# EAGLE board box (EAGLE 6.5.0)
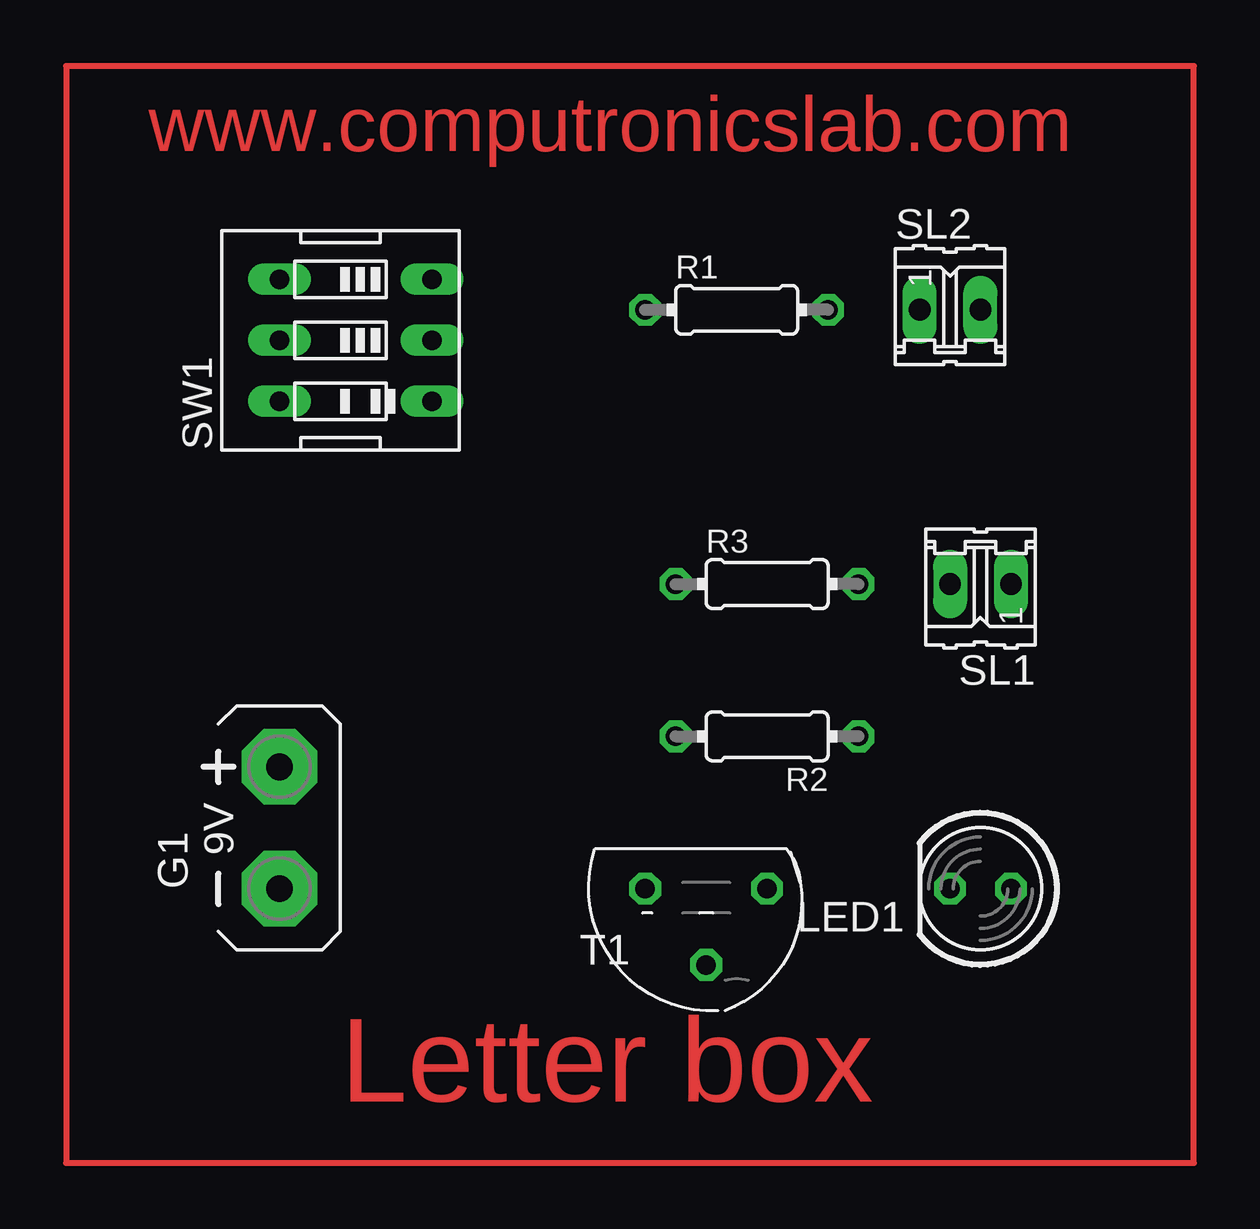
[diagram p0: board, top side]
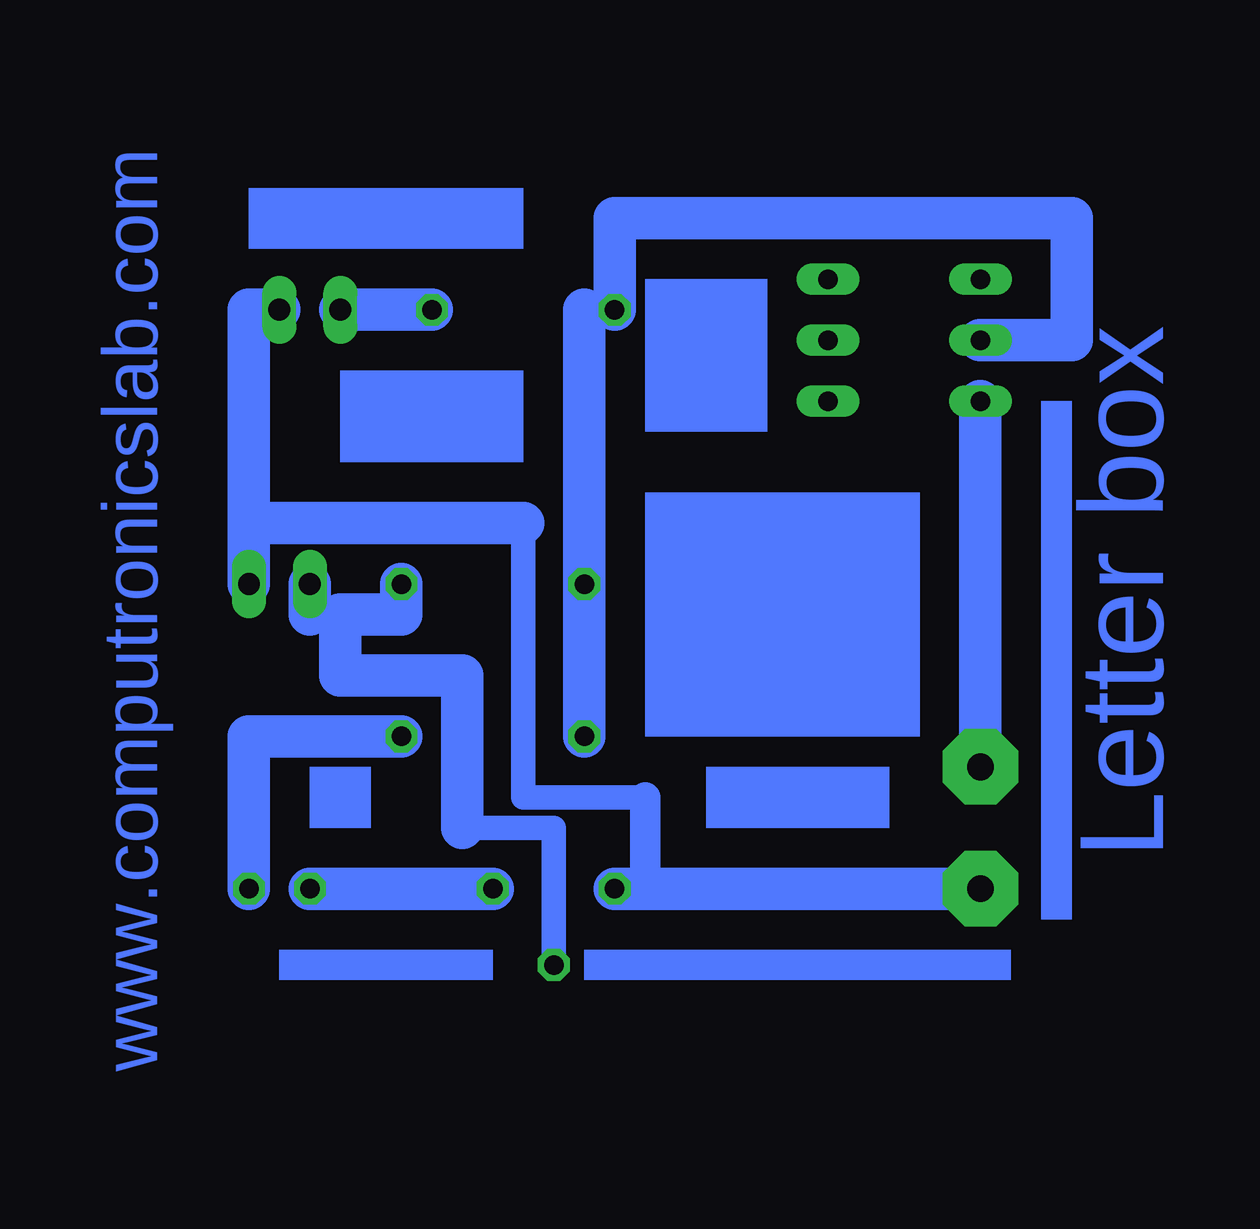
[diagram p1: board, bottom side, seen from below]

No outline drawn. Coordinates in mm, seen from the top.
Copper layers (1*16): Top 0.035mm / dielectric 1.5mm / Bottom 0.035mm
Design rules "default": minimum track width 10mil, minimum drill 24mil, track to track 8mil, track to pad 8mil, pad to pad 8mil, via to via 8mil, smd to smd 8mil, copper to edge 40mil, drill to drill 8mil, minimum pad ring 10mil, minimum via ring 8mil, stop-mask expansion 4mil, vias tented up to drill 0mil, thermal gap 10mil

## Footprints (pad centres in the part's own frame; a part is rotated, then mirrored left to right if it is on the bottom)
AB9V = drill 1.118 pad 3.15 octagon: + 0,2.54; - 0,-2.54
LED5MM = drill 0.813 octagon: A -1.27,0; K 1.27,0
0204/7 = drill 0.813 octagon: 1 -3.81,0; 2 3.81,0
02P = drill 0.914 long: 1 -1.27,0; 2 1.27,0
EDG-03 = drill 0.813 long: 1 -2.54,-3.81; 2 0,-3.81; 3 2.54,-3.81; 4 2.54,2.54; 5 0,2.54; 6 -2.54,2.54
TO92 = drill 0.813 octagon: 1 2.54,-1.27; 2 0,1.905; 3 -2.54,-1.27

## Placement (x,y rotation side)
G1  AB9V  [AB9V]  10.16,36.83 0 top
LED1  5mm  [LED5MM]  39.37,34.29 180 top
R1  330E  [0204/7]  29.21,58.42 0 top
R2  220E  [0204/7]  30.48,40.64 180 top
R3  100k  [0204/7]  30.48,46.99 0 top
SL1  LDR  [02P]  39.37,46.99 180 top
SL2  LED  [02P]  38.1,58.42 0 top
SW1  on/off button  [EDG-03]  12.7,57.15 90 top
T1  BC547  [TO92]  27.94,33.02 180 top

## Library data of the parts
G1 = battery
LED1 = led
R1-R3 = eagle-ltspice; SPICEMODEL: NONE; SPICEPREFIX: R
SL1 SL2 = con-amp-quick; OC_FARNELL: unknown; OC_NEWARK: unknown
SW1 = special
T1 = transistor

## Nets
N$1: G1.+ SW1.6
N$2: G1.- SL1.1 SL2.2 T1.1
N$3: R3.2 SL1.2 T1.2
N$4: R1.2 SL2.1
N$5: LED1.K T1.3
N$6: LED1.A R2.1
N$7: R1.1 R2.2 R3.1 SW1.5

## Tracks (layer width: path | path; a pad name or v marks a point on that pad's centre or on a via)
N$1
  Bottom 1.778: G1.+ SW1.6
N$2
  Bottom 1.016: 29.21,49.53 29.21,38.1 24.13,38.1
  Bottom 1.27: 24.13,34.29 24.13,38.1
  Bottom 1.778: 40.64,49.53 40.64,58.42 SL2.2 | 40.64,49.53 SL1.1 | G1.- 24.13,34.29 T1.1 | 29.21,49.53 40.64,49.53
N$3
  Bottom 0.254: 38.1,45.72 36.83,45.72
  Bottom 1.016: T1.2 27.94,36.83 31.75,36.83
  Bottom 1.778: SL1.2 38.1,45.72 | 31.75,36.83 31.75,43.18 36.83,43.18 36.83,45.72 34.29,45.72 R3.2
N$4
  Bottom 1.778: SL2.1 R1.2
N$5
  Bottom 1.778: LED1.K T1.3
N$6
  Bottom 1.778: LED1.A 40.64,40.64 R2.1
N$7
  Bottom 0.254: R1.1 26.67,58.42
  Bottom 1.778: R2.2 R3.1 26.67,58.42 | R1.1 25.4,62.23 6.35,62.23 6.35,57.15 SW1.5
N$8
  Top 0.254: 1.27,68.58 1.27,22.86 48.26,22.86 48.26,68.58 1.27,68.58
(copper drawn outside any net)
  shapes: Bottom area x9

## Text on the board
Top: www.computronicslab.com | Letter box
Bottom: Letter box | www.computronicslab.com